# Altium PCB WaterDepth.PcbDoc
Units mm, origin at the board's own origin, x right, y up, seen from the top; angles counter-clockwise.
Board outline 26.42 x 32.13 mm, 2 copper layers (Top Layer, Bottom Layer); 56 components, 45 nets, 142 pads, 25 vias.
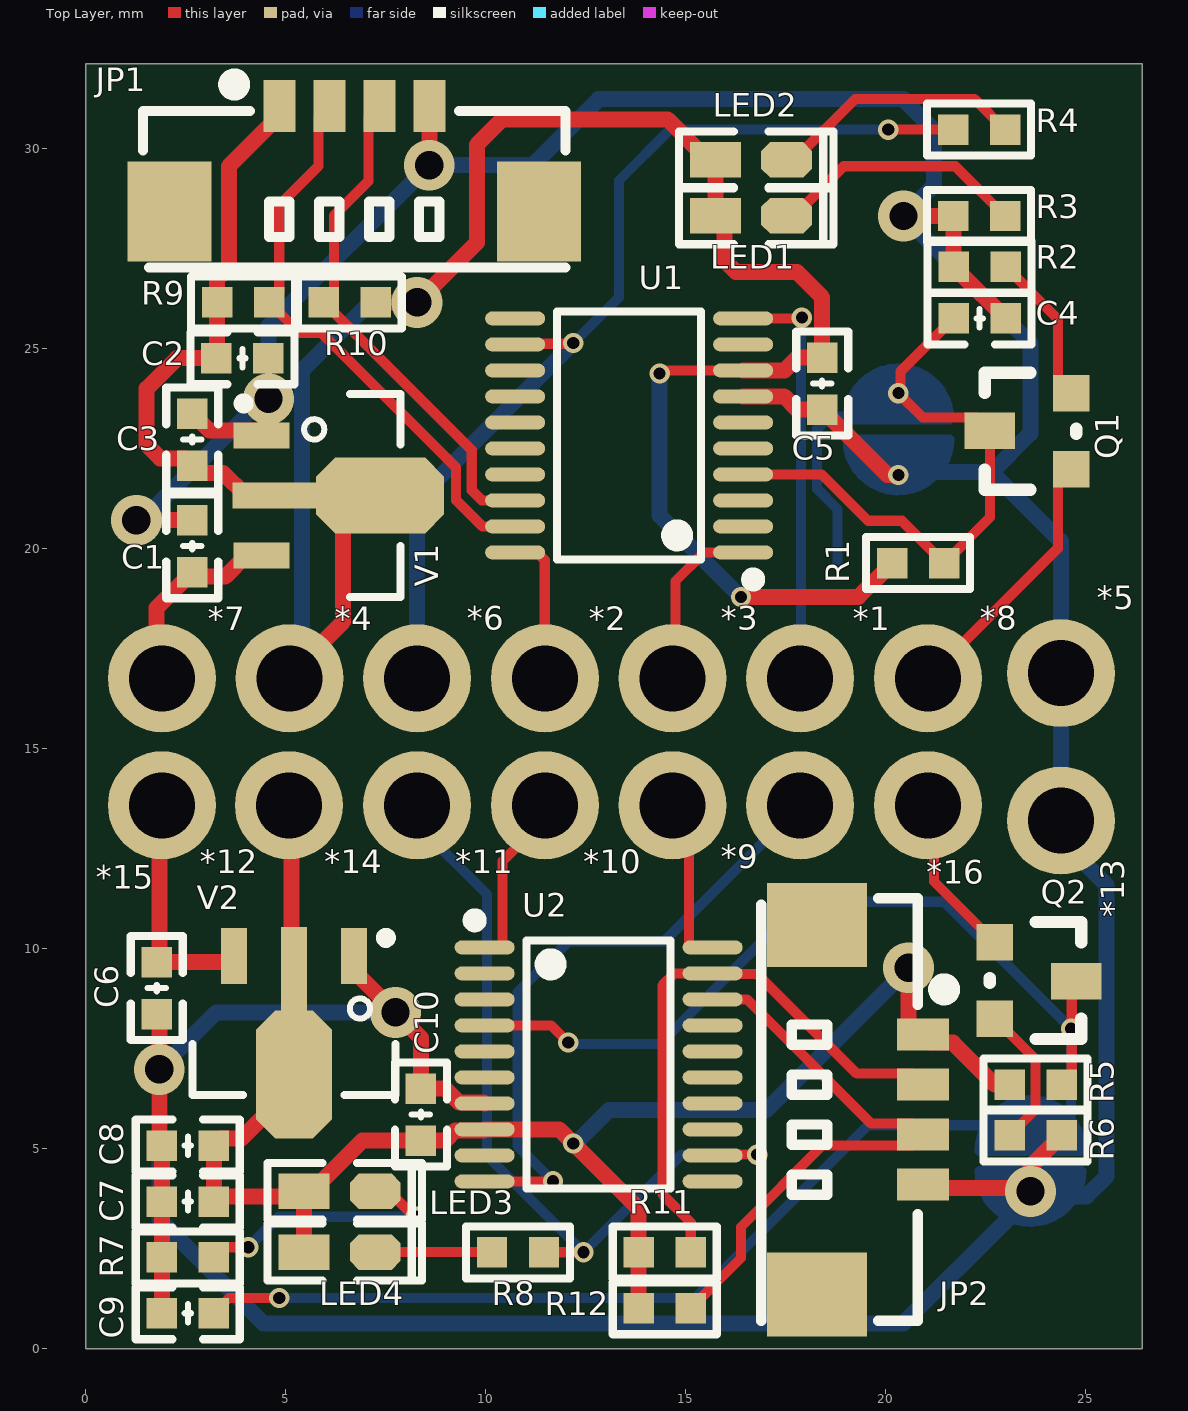
[diagram p0: Top Layer view]
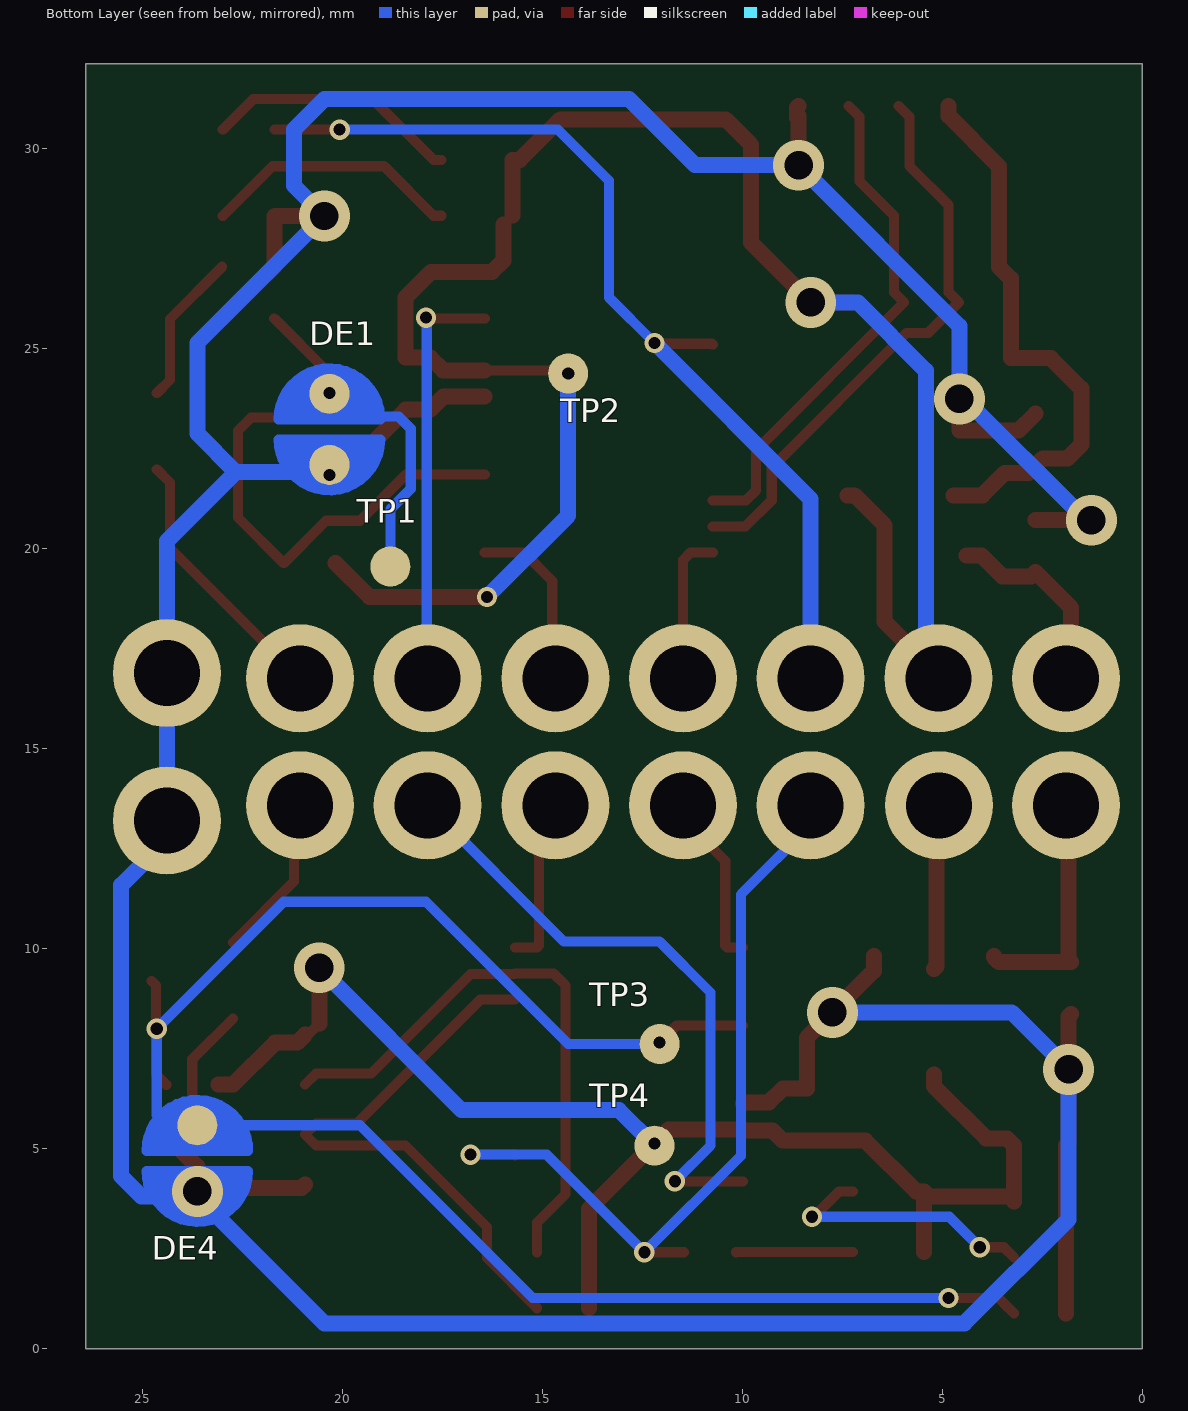
[diagram p1: Bottom Layer view, seen from below]
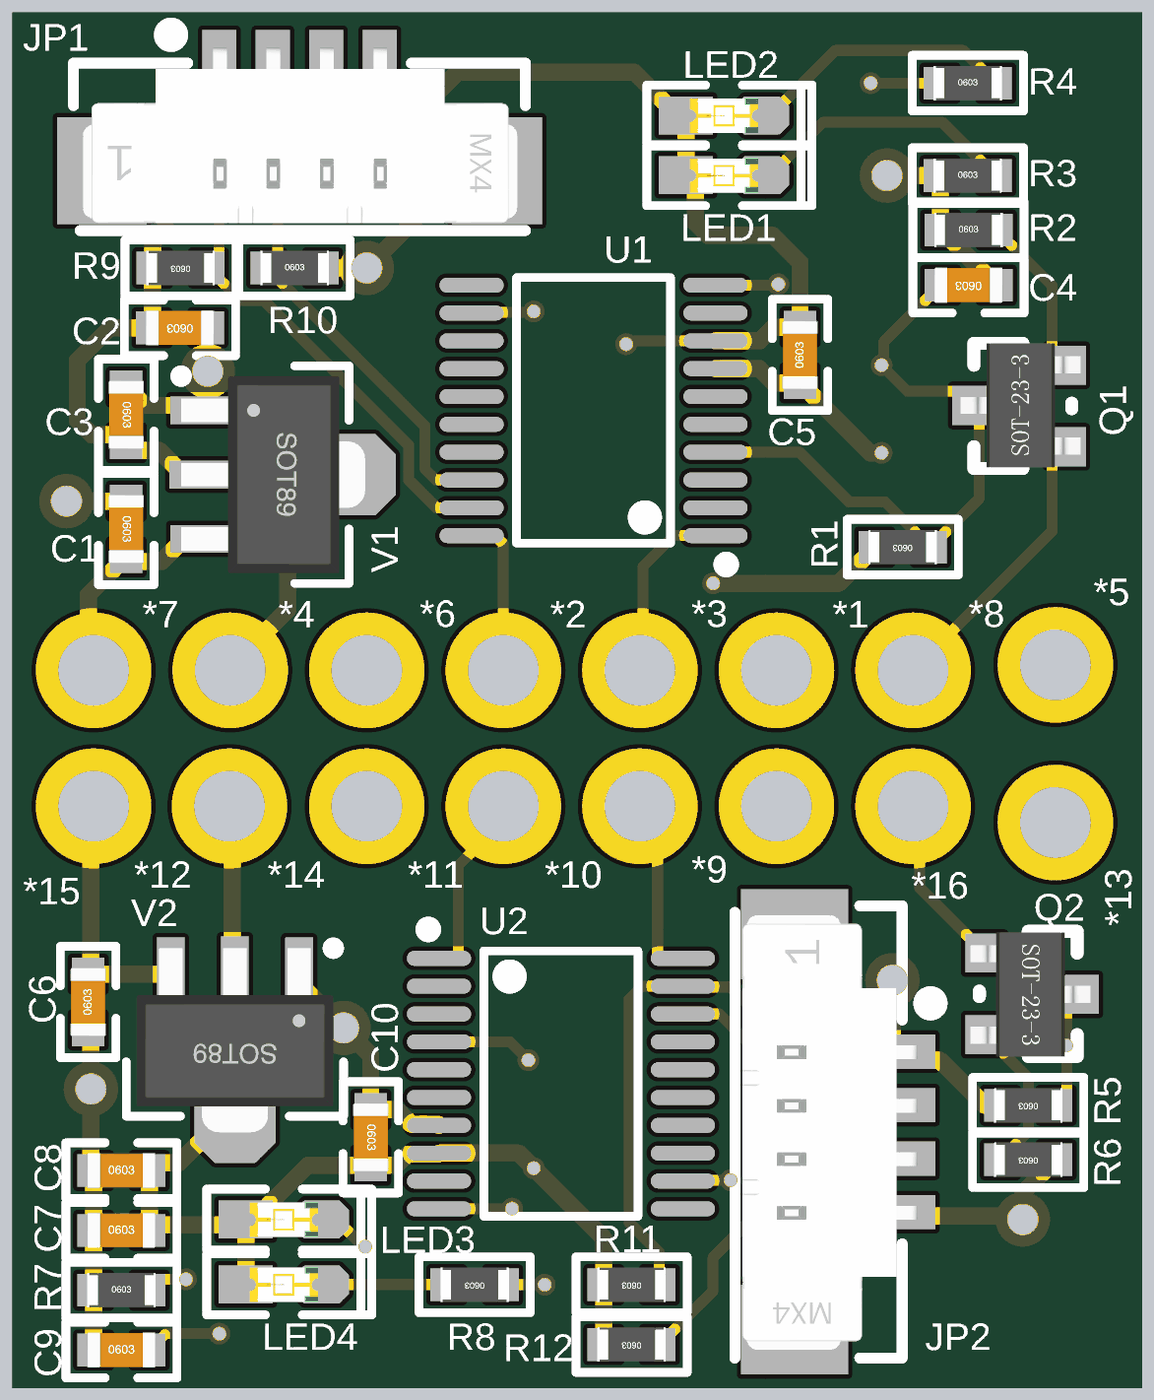
[diagram p2: 3D render of the assembled board from above, using the file's embedded part models]

## Layer stack, top to bottom
Top Solder: solder mask 0.0102, Solder Resist, Dk 3.5
Top Layer: signal copper 0.0356
Dielectric 1: dielectric 0.32, FR-4, Dk 4.8
Bottom Layer: signal copper 0.0356
Bottom Solder: solder mask 0.0102, Solder Resist, Dk 3.5

## Board outline
1.016,0 26.416,0 26.416,32.131 0,32.131 0,0

## Design rules (kind name [scope] priority, off if disabled: settings)
Clearance [All] p1: gap=0.4 ignorepadtopadclearanceinfootprint=FALSE except(0: Arc-Arc Arc-Track Arc-SMDPad Arc-THPad Arc-Via Arc-Text Arc-Hole Track-Track Track-SMDPad Track-THPad Track-Via Track-Text Track-Hole SMDPad-SMDPad SMDPad-THPad SMDPad-Via SMDPad-Text SMDPad-Hole THPad-THPad THPad-Via THPad-Text THPad-Hole Via-Via Via-Text Via-Hole Text-Text Text-Hole)
PolygonConnect [All] p1: connectstyle=Relief reliefconductorwidth=0.254 reliefentries=4 polygonreliefangle="90 Angle" airgapwidth=0.254
RoutingVias [All] p1: holewidth=0.711 width=1.27 viastyle="Through Hole" minholewidth=0.711 minwidth=1.27 maxholewidth=0.711 maxwidth=1.27
SolderMaskExpansion [All] p1: expansion=0.102
Width [All] p1: maxlimit=1.5 minlimit=0.254 preferedwidth=0.4
30 further rules are at their usual default settings.

## Classes and differential pairs
component class WaterDepth: *2 *3 *6 *7 *8 *10 *11 *13 *15 *16 C1 C2 C3 C6 C7 C8 C9 C10 DE1 DE4 JP1 JP2 LED1 LED2 LED3 LED4 Q1 Q2 R1 R2 R3 R4 R5 R6 R7 R8 R9 R10 R11 R12 TP1 TP2 TP3 TP4 U1 U2 V1 V2

## Components (designator, comment, footprint, x,y, rotation, side; value= is the part's Value field where it differs from the comment)
*1 "CS" R100 17.864,16.764 r0 top
*2 "CS" R100 11.481,16.764 r0 top
*3 "CS" R100 14.672,16.764 r0 top
*4 "CS" R100 5.097,16.764 r0 top
*5 "CS" R100 24.384,16.891 r0 top
*6 "CS" R100 8.289,16.764 r180 top
*7 "CS" R100 1.905,16.764 r0 top
*8 "CS" R100 21.056,16.764 r0 top
*9 "CS" R100 17.864,13.589 r0 top
*10 "CS" R100 14.672,13.589 r0 top
*11 "CS" R100 11.481,13.589 r0 top
*12 "CS" R100 5.08,13.589 r0 top
*13 "CS" R100 24.384,13.208 r0 top
*14 "CS" R100 8.289,13.589 r0 top
*15 "CS" R100 1.905,13.589 r0 top
*16 "CS" R100 21.056,13.589 r0 top
C1 "104" "C 0603_L" 2.667,20.066 r270 top
C2 "104" "C 0603_L" 3.922,24.765 r180 top
C3 "104" "C 0603_L" 2.667,22.733 r270 top
C4 "104" "C 0603_L" 22.352,25.761 r180 top
C5 "104" "C 0603_L" 18.415,24.13 r90 top
C6 "104" "C 0603_L" 1.778,9.017 r90 top
C7 "104" "C 0603_L" 2.555,3.683 r0 top
C8 "104" "C 0603_L" 2.555,5.08 r0 top
C9 "104" "C 0603_L" 2.555,0.889 r0 top
C10 "104" "C 0603_L" 8.382,5.857 r270 top
DE1 "DEBUG PAD" DEBUG_A#1 20.32,22.987 r90 bottom
DE4 "DEBUG PAD" DEBUG_A#2 23.622,4.699 r90 bottom
JP1 "HDR-1X4" "MX 1.25-LS-4P" 6.731,28.814 r0 top
JP2 "HDR-1X4" "MX 1.25-LS-4P" 18.669,5.969 r270 top
LED1 "红色" "LED 0603W" 16.637,28.321 r0 top
LED2 "红色" "LED 0603W" 16.637,29.718 r0 top
LED3 "红色" "LED 0603W" 6.35,3.93 r0 top
LED4 "红色" "LED 0603W" 6.35,2.413 r0 top
Q1 "NPN" SOT-23 23.749,22.876 r90 top
Q2 "NPN" SOT-23 23.622,9.271 r270 top
R1 "33K" "R 0603_L" 20.813,19.642 r180 top
R2 "3.3K" "R 0603_L" 22.352,27.051 r0 top
R3 "3.3K" "R 0603_L" 22.337,28.321 r0 top
R4 "3.3K" "R 0603_L" 22.337,30.48 r0 top
R5 "33K" "R 0603_L" 23.749,6.604 r180 top
R6 "3.3K" "R 0603_L" 23.749,5.334 r180 top
R7 "3.3K" "R 0603_L" 2.555,2.286 r0 top
R8 "3.3K" "R 0603_L" 10.81,2.413 r180 top
R9 "4.7K" "R 0603_L" 3.937,26.162 r180 top
R10 "4.7K" "R 0603_L" 6.604,26.162 r0 top
R11 "4.7K" "R 0603_L" 14.478,2.413 r180 top
R12 "4.7K" "R 0603_L" 14.478,1.016 r180 top
TP1 "TEST" "TEST 1" 18.796,19.558 r0 bottom
TP2 "TEST" "TEST 1" 14.351,24.384 r270 bottom
TP3 "TEST" "TEST 1" 12.065,7.62 r90 bottom
TP4 "TEST" "TEST 1" 12.192,5.08 r90 bottom
U1 "STM8L101F3P6" TSSOP-20 13.589,22.836 r90 top
U2 "STM8L101F3P6" TSSOP-20 12.827,7.112 r270 top
V1 "AMS1117-3V3" SOT89_N 6.35,21.336 r270 top
V2 "AMS1117-3V3" SOT89_N 5.207,7.874 r180 top

## Footprints (in the part's own frame and the unit in brackets; to place one, negate y for a bottom-side part, rotate by r counter-clockwise, add the part's x,y. Pads: shape width x height; smd on the part's side, far side on the other; paste and mask are expansions set on the pad)
"C 0603_L" [mil] "无极性贴片电容"
  rect 30x30 smd: 1(-25.59,0) 2(25.59,0)
  silkscreen extent -51,-26 51,26, body extent -31,-16 31,16, height 32
DEBUG_A#1 [mm] "调试断点焊盘"
  round 1 smd paste-1: 1(-0.889,0) 2(0.889,0)
  Top Layer region: -0.254,1.27 -0.254,-1.27 -0.762,-1.143 -1.397,-0.508 -1.524,0.254 -1.27,0.762 -1.016,1.016 -0.508,1.27
  Top Layer region: 0.254,1.27 0.254,-1.27 0.762,-1.143 1.397,-0.508 1.524,0.254 1.27,0.762 1.016,1.016 0.508,1.27
  Top Layer lines w0.254: -0.254,-1.27 cw(c-0.254,0) -1.067,0.975 cw(c-0.254,0) -1.036,1.001 cw(c-0.254,0) -0.254,1.27 -0.254,-1.27 ; 0.254,-1.27 ccw(c0.254,0) 0.319,-1.268 ccw(c0.254,0) 0.774,1.159 ccw(c0.254,0) 0.254,1.27 0.254,-1.27
DEBUG_A#2 [mm] "调试断点焊盘"
  round 1 smd paste-1: 1(-0.889,0) 2(0.889,0)
  Top Layer region: -0.254,1.27 -0.254,-1.27 -0.762,-1.143 -1.397,-0.508 -1.524,0.254 -1.27,0.762 -1.016,1.016 -0.508,1.27
  Top Layer region: 0.254,1.27 0.254,-1.27 0.762,-1.143 1.397,-0.508 1.524,0.254 1.27,0.762 1.016,1.016 0.508,1.27
  Top Layer lines w0.254: -0.254,-1.27 cw(c-0.254,0) -1.412,-0.523 cw(c-0.254,0) -0.889,1.1 cw(c-0.254,0) -0.254,1.27 -0.254,0 -0.254,-1.27 ; 0.254,-1.27 ccw(c0.254,0) 0.889,-1.1 ccw(c0.254,0) 1.086,0.959 ccw(c0.254,0) 0.254,1.27 0.254,-1.27
"LED 0603W" [mil] "白色0603LED"
  rect 50x35 smd: 1(-35,0.26)
  oct 50x35 smd: 2(35,0.26)
  silkscreen extent -71,-28 81,28, body extent -31,-16 32,16, height 18
"MX 1.25-LS-4P" [mm] "长：9.75m，宽：3.7mm，高：4.7mm"
  rect 2.1x2.5 smd: 0(-4.632,-0.381) 0(4.604,-0.381)
  rect 0.8x1.3 smd: 1(-1.889,2.261) 2(-0.639,2.261) 3(0.611,2.261) 4(1.861,2.261)
  silkscreen extent -5.29,-1.78 5.27,2.99, body extent -5.07,-1.6 5.07,2.5, height 4.7
R100 [mm] "R100探针焊盘"
  round 2.7 hole 1.651: 1(0,0)
"R 0603_L" [mil] "1/10W贴片电阻"
  rect 30x30 smd: 1(-25.59,0) 2(25.59,0)
  silkscreen extent -51,-26 51,26, body extent -31,-16 32,16, height 16
SOT89_N [mm] "4.6x4.3x1.6mm(长宽高)"
  rect 0.65x1.4 smd: 1(-1.5,-1.952) 3(1.5,-1.952)
  oct 1.9x3.2 smd: 2(0,1.016)
  rect 0.65x2.1 smd: 2(0,-1.626)
  silkscreen extent -2.54,-2.52 2.54,1.52, body extent -2.3,-2.4 2.3,1.9, height 1.6
SOT-23 [mil]
  rect 36x36 smd: B(-35,-35) E(40,-35)
  rect 36x50 smd: C(3,45)
  silkscreen extent -55,-40 60,50, body extent -54,-48 60,62, height 47
"TEST 1" [mm] "测试点1mm"
  round 1 smd paste-1: 1(0,0)
TSSOP-20 [mm]
  oval 0.35x1.5 smd: 1(-2.925,-2.85) 2(-2.275,-2.85) 3(-1.625,-2.85) 4(-0.975,-2.85) 5(-0.325,-2.85) 6(0.325,-2.85) 7(0.975,-2.85) 8(1.625,-2.85) 9(2.275,-2.85) 10(2.925,-2.85) 11(2.925,2.85) 12(2.275,2.85) 13(1.625,2.85) 14(0.975,2.85) 15(0.325,2.85) 16(-0.325,2.85) 17(-0.975,2.85) 18(-1.625,2.85) 19(-2.275,2.85) 20(-2.925,2.85)
  silkscreen extent -3.75,-3.25 3.1,1.8

## Part data
*1 *2 *3 *4 *5 *6 *7 *8 *9 *10 *11 *12 *13 *14 *15 *16: "探针焊盘"
C1 C2 C3 C4 C5 C6 C7 C8 C9 C10: library part C, "无极性贴片电容"
DE1 DE4: library part DEBUG, "调试断点焊盘"
JP1 JP2: library part "Header 4", "4P接插件", BOM名称=4P, 学习资源=www.oooc
LED1 LED2 LED3 LED4: library part LED-SMD, "贴片LED", BOM名称=Ì, 学习资源=www.oooc
Q1 Q2: "NPN三极管"
R1 R2 R3 R4 R5 R6 R7 R8 R9 R10 R11 R12: library part R, "贴片电阻"
TP1 TP2 TP3 TP4: "测试点", 学习资源=www.oooc
U1 U2: "MCU", Package=TSSOP-20, SuppliersPartNumber=C30044, ComponentLink1Description=供应, ComponentLink1URL=http://www.szlcsc.com/product/details_30799.html, Supplier=LC
V1 V2: library part AMS1117, "三端稳压芯片", BOM名称=Î, 学习资源=www.oooc

## Via types
v1: diameter 0.508, hole 0.305, Top Layer to Bottom Layer, tented both sides, 16 vias
v2: diameter 1.27, hole 0.711, Top Layer to Bottom Layer, tented both sides, 9 vias

## Nets (pads, with @x,y where several pads share a name; then routed paths per layer and width w, separated by ;. In a path a pad name is that pad's centre, name@x,y a point inside that pad or via, vN(x,y) a via of type N, cw(c..) or ccw(c..) an arc to the next point about the centre after c; other vN are vias at no path point)
3V3: *4.1 C2.2 C3.2 C5.2 JP1.1 LED1.1 LED2.1 R1.2 R9.2 R10.2 TP2.1 U1.8 V1.2 | length 65.1
  Top Layer w0.254: v1(14.351,24.384) 14.42,24.384 14.497,24.461 U1.8 ; LED1.1 LED1.1@15.973,28.103
  Top Layer w0.4: V1.2@4.724,21.336 3.999,21.336 3.433,21.902 2.848,21.902 C3.2 2.486,22.264 1.866,22.264 1.524,22.606 1.524,24.003 2.286,24.765 C2.2 3.28,24.773 3.28,26.155 R9.2 3.287,26.756 3.582,27.051 3.582,29.564 4.842,30.825 JP1.1 ; *4.1 5.097,16.833 6.441,18.178 6.441,20.586 7.191,21.336 V1.2@7.366,21.336 ; R10.2 v2(8.289,26.162) 9.779,27.652 9.779,30.099 10.414,30.734 14.548,30.734 15.558,29.725 LED2.1 LED1.1 ; LED1.1@15.973,28.103 15.973,27.207 16.256,26.924 17.78,26.924 18.415,26.289 C5.2 17.795,24.78 17.476,24.461 U1.8 ; v1(16.383,18.796) 19.317,18.796 R1.2
  Bottom Layer w0.4: *4.1 5.407,17.074 5.407,24.457 7.112,26.162 v2(8.289,26.162) ; v1(14.351,24.384) 14.351,20.828 v1(16.383,18.796)
3V3_B: *12.1 C7.2 C8.2 C10.2 JP2.1 LED3.1 LED4.1 R5.2 R11.2 R12.2 TP4.1 U2.8 V2.2 | length 39.4
  Top Layer w0.254: JP2.1@20.574,8.131 20.847,7.858 JP2.1
  Top Layer w0.4: *12.1 5.143,13.525 5.143,9.563 V2.2@5.207,9.5 ; V2.2@5.207,6.858 5.207,6.566 3.902,5.261 3.386,5.261 C8.2 C7.2 3.332,3.81 5.334,3.81 LED3.1 ; LED4.1 LED3.1 ; R12.2 R11.2 13.828,3.498 v1(12.192,5.134) 11.839,5.487 U2.8 9.952,5.462 9.246,5.462 8.991,5.207 C10.2 6.921,5.207 5.651,3.937 LED3.1 ; JP2.1@20.574,8.131 v2(20.574,9.525) ; JP2.1 21.13,7.658 21.679,7.658 22.733,6.604 R5.2
  Bottom Layer w0.4: TP4.1 13.081,5.969 17.018,5.969 v2(20.574,9.525)
+5: *7.1 C1.2 V1.3 | length 5.1
  Top Layer w0.4: *7.1 1.778,16.891 1.778,18.527 C1.2 2.779,19.304 3.491,19.304 4.023,19.836 V1.3
+5_B: *15.1 C6.2 V2.3 | length 6
  Top Layer w0.4: *15.1 1.842,13.526 1.842,9.73 C6.2 3.582,9.667 3.707,9.792 V2.3
Ctrl: *8.1 Q1.B | length 6.7
  Top Layer w0.254: *8.1 24.308,20.016 24.308,21.657 Q1.B
Ctrl_B: *16.1 Q2.B | length 4.1
  Top Layer w0.254: *16.1 21.209,13.436 21.209,11.684 Q2.B
GND: *5.1 *13.1 C1.1 C2.1 C3.1 C4.1 C5.1 C6.1 C7.1 C8.1 C9.1 C10.1 DE1.1 DE4.1 JP1.4 JP2.4 R2.1 R3.1 R6.1 R7.1 U1.7 U2.7 V1.1 V2.1 | length 125.5
  Top Layer w0.4: v2(1.27,20.716) C1.1 ; C6.1 1.842,8.303 v2(1.842,6.985) 1.842,5.143 C8.1 C7.1 R7.1 C9.1 ; C3.1 3.098,22.952 4.563,22.952 4.572,22.961 v2(4.572,23.749) ; V2.1 6.707,9.451 v2(7.747,8.411) 8.382,7.776 C10.1 8.987,6.507 9.332,6.162 9.952,6.162 U2.7 ; v2(8.592,29.591) 8.592,30.825 8.636,30.781 8.636,31.031 JP1.4 ; U1.7 17.464,23.811 17.795,23.48 C5.1 20.051,21.844 v1(20.32,21.844) ; v2(20.447,28.321) 21.672,28.321 21.68,28.314 R3.1 21.694,28.314 21.694,27.058 R2.1 21.883,26.87 21.893,26.87 C4.1 ; JP2.4 21.015,4.022 23.537,4.022 v2(23.622,3.937) 23.622,4.557 R6.1
  Bottom Layer w0.4: v2(1.27,20.716) 1.405,20.716 4.572,23.884 4.572,25.571 v2(8.592,29.591) 11.176,29.591 12.827,31.242 20.447,31.242 21.209,30.48 21.209,29.083 v2(20.447,28.321) 23.622,25.146 23.622,22.884 22.657,21.92 ; v2(7.747,8.411) 3.268,8.411 v2(1.842,6.985) 1.842,3.238 4.445,0.635 20.447,0.635 23.099,3.287 DE4.1 ; DE1.1 20.498,21.92 21.295,21.92 22.657,21.92 ; 24.722,3.81 25.019,3.81 25.527,4.318 25.527,11.593 24.384,12.736 *13.1 *5.1 24.384,20.193 22.657,21.92
KEY: *1.1 U1.10 | length 10.5
  Top Layer w0.254: U1.10 17.887,25.761 v1(17.907,25.781)
  Bottom Layer w0.254: *1.1 17.886,16.785 17.886,25.76 v1(17.907,25.781)
KEY_B: *9.1 U2.10 | length 15.9
  Top Layer w0.254: U2.10 v1@11.746,4.187
  Bottom Layer w0.254: v1(11.684,4.191) 10.795,5.08 10.795,8.91 12.065,10.18 14.455,10.18 *9.1
LED: *6.1 R4.1 U1.12 | length 24.9
  Top Layer w0.254: U1.12 10.756,25.128 12.174,25.128 v1(12.192,25.146) ; v1(20.066,30.48) R4.1
  Bottom Layer w0.254: v1(12.192,25.146) 13.335,26.289 13.335,29.21 14.605,30.48 v1(20.066,30.48)
  Bottom Layer w0.4: *6.1 8.289,21.243 v1(12.192,25.146)
LED_B: *14.1 R8.1 U2.12 | length 20.4
  Top Layer w0.254: R8.1 v1(12.446,2.413) ; U2.12 15.695,4.855 v1(16.793,4.855)
  Bottom Layer w0.254: *14.1 8.289,13.106 10.033,11.361 10.033,4.826 v1(12.446,2.413) 14.888,4.855 v1(16.793,4.855)
NetC4_2: C4.2 DE1.2 Q1.C R1.1 TP1.1 U1.4 | length 20.9
  Top Layer w0.254: U1.4 18.398,21.861 19.558,20.701 20.404,20.701 R1.1 22.606,20.785 Q1.C 22.276,23.283 20.93,23.283 v1(20.32,23.892) 20.369,23.941 20.369,24.428 C4.2
  Bottom Layer w0.254: TP1.1 18.796,20.992 18.288,21.5 18.288,23.006 18.588,23.306 19.052,23.306 19.644,23.306 20.214,23.876 DE1.2
NetC9_2: C9.2 DE4.2 Q2.C R5.1 TP3.1 U2.4 | length 45.3
  Top Layer w0.254: C9.2@3.459,1.143 C9.2 3.586,1.27 v1(4.842,1.27) ; U2.4 11.636,8.087 v1(12.065,7.658) ; R5.1 24.653,6.858 24.653,9.083 Q2.C
  Bottom Layer w0.254: v1(4.842,1.27) 15.24,1.27 19.558,5.588 22.522,5.588 DE4.2 ; TP3.1 14.351,7.62 17.907,11.176 21.463,11.176 v1(24.638,8.001) 24.638,5.842 24.581,5.785
NetLED1_2: LED1.2 R3.2 | length 6.5
  Top Layer w0.254: LED1.2 17.717,28.328 18.954,29.564 21.744,29.564 R3.2
NetLED2_2: LED2.2 R4.2 | length 6.4
  Top Layer w0.254: LED2.2 17.717,29.725 19.234,31.242 22.225,31.242 R4.2
NetLED3_2: LED3.2 R7.2 | length 6.7
  Top Layer w0.254: R7.2 3.459,2.54 v1(4.064,2.54) ; LED3.2 7.577,3.937 v1@8.212,3.302
  Bottom Layer w0.254: v1(4.064,2.54) 4.826,3.302 v1(8.255,3.302)
NetLED4_2: LED4.2 R8.2 | length 2.9
  Top Layer w0.254: LED4.2 10.153,2.42 R8.2
NetQ1_E: Q1.E R2.2 | length 3.8
  Top Layer w0.254: R2.2 24.308,25.745 24.308,24.222 Q1.E
NetQ2_E: Q2.E R6.2 | length 3.6
  Top Layer w0.254: Q2.E 23.749,7.239 23.749,5.984 R6.2
PA0: U1.3
PA0_B: U2.3
PA2: U1.5
PA2_B: U2.5
PA3: U1.6
PA3_B: U2.6
PB1: U1.11
PB1_B: U2.11
PB3: U1.13
PB3_B: U2.13
PB4: U1.14
PB4_B: U2.14
PB5: U1.15
PB5_B: U2.15
PB6: U1.16
PB6_B: U2.16
PB7: U1.17
PB7_B: U2.17
WD_SCL: JP1.2 R9.1 U1.19 | length 14.5
  Top Layer w0.254: JP1.2 5.819,30.802 5.819,29.568 4.841,28.59 4.841,26.416 R9.1 5.349,25.4 5.892,25.4 9.264,22.028 9.264,21.216 9.919,20.561 U1.19
WD_SCL_B: JP2.2 R11.1 U2.19 | length 14.8
  Top Layer w0.254: R11.1 15.128,3.16 14.42,3.868 14.42,9.086 14.721,9.387 U2.19 15.695,9.369 16.793,9.369 19.281,6.881 20.657,6.881 JP2.2
WD_SDA: JP1.3 R10.1 U1.18 | length 12.9
  Top Layer w0.254: JP1.3 7.069,30.802 7.069,29.191 6.208,28.33 6.208,26.416 R10.1 9.652,22.464 9.652,21.463 9.904,21.211 U1.18
WD_SDA_B: JP2.3 R12.1 U2.18 | length 14.7
  Top Layer w0.254: R12.1 16.383,2.271 16.383,3.048 18.42,5.085 20.657,5.085 JP2.3 20.657,5.631 19.642,5.631 16.536,8.737 U2.18
WD_UART_RX: *2.1 U1.20 | length 3.8
  Top Layer w0.254: U1.20 11.288,19.911 11.481,19.718 *2.1
WD_UART_RX_B: *10.1 U2.20 | length 4.3
  Top Layer w0.254: *10.1 15.084,13.178 15.084,10.081 15.128,10.037 U2.20
WD_UART_TX: *3.1 U1.1 | length 4.4
  Top Layer w0.254: *3.1 14.749,16.841 14.749,19.194 15.466,19.911 U1.1
WD_UART_TX_B: *11.1 U2.1 | length 4.4
  Top Layer w0.254: U2.1 10.381,10.037 10.425,10.081 10.425,12.197 11.481,13.252 *11.1
pads on no net: JP1.0 JP2.0 U1.2 U1.9 U2.2 U2.9

## Silkscreen, mask and mechanical layers (free items; w line width, h text height)
Mechanical 1:
  lines w0.254: 0,0 1.016,0 25.4,0 26.035,0 26.416,0 26.416,30.48 26.416,30.988 26.416,31.496 26.416,31.75 26.416,32.131 0,32.131 0,0